# Altium PCB PCB1.PcbDoc
Units mil, origin at the board's own origin, x right, y up, seen from the top; angles counter-clockwise.
Board outline 10000 x 8000 mil, 2 copper layers (Top Layer, Bottom Layer); 40 components, 29 nets, 128 pads, 0 vias.
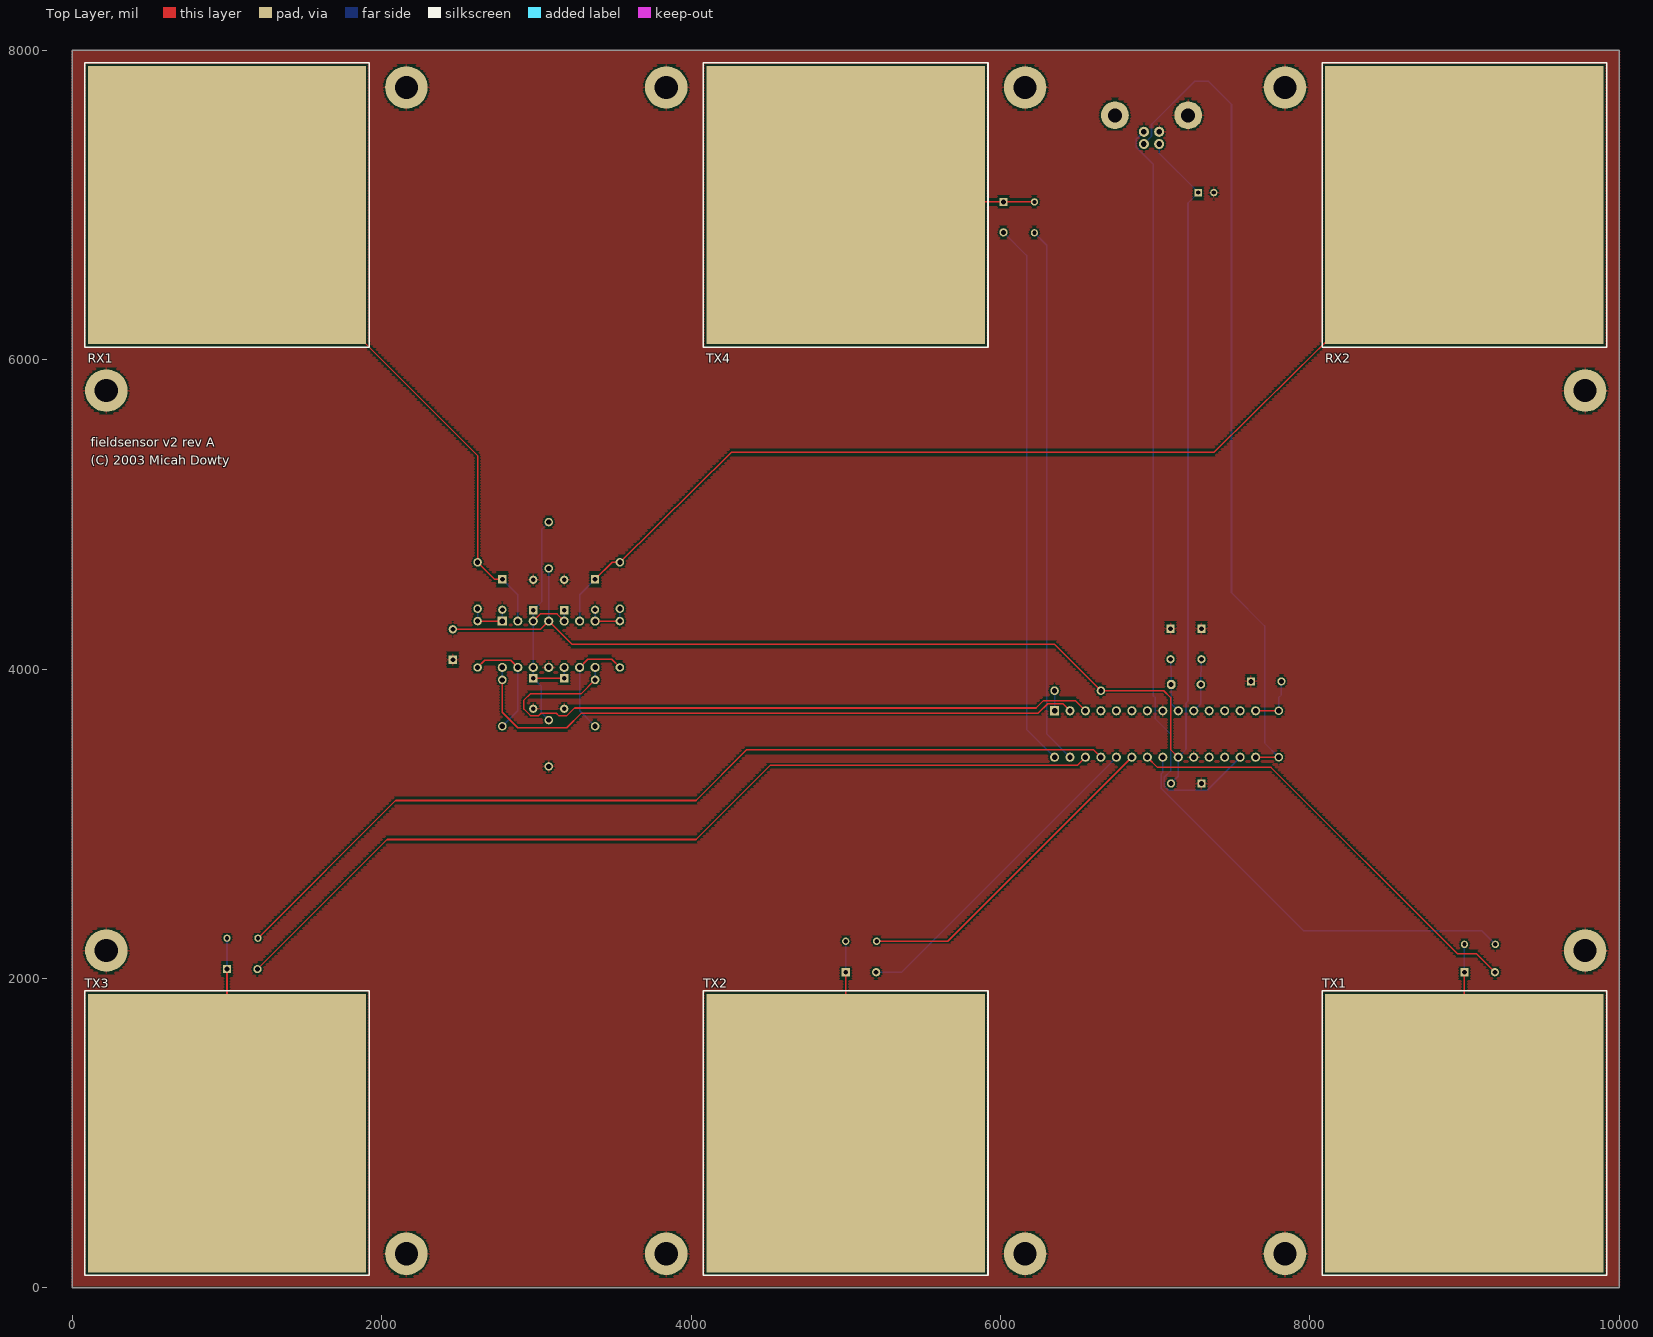
[diagram p0: Top Layer view]
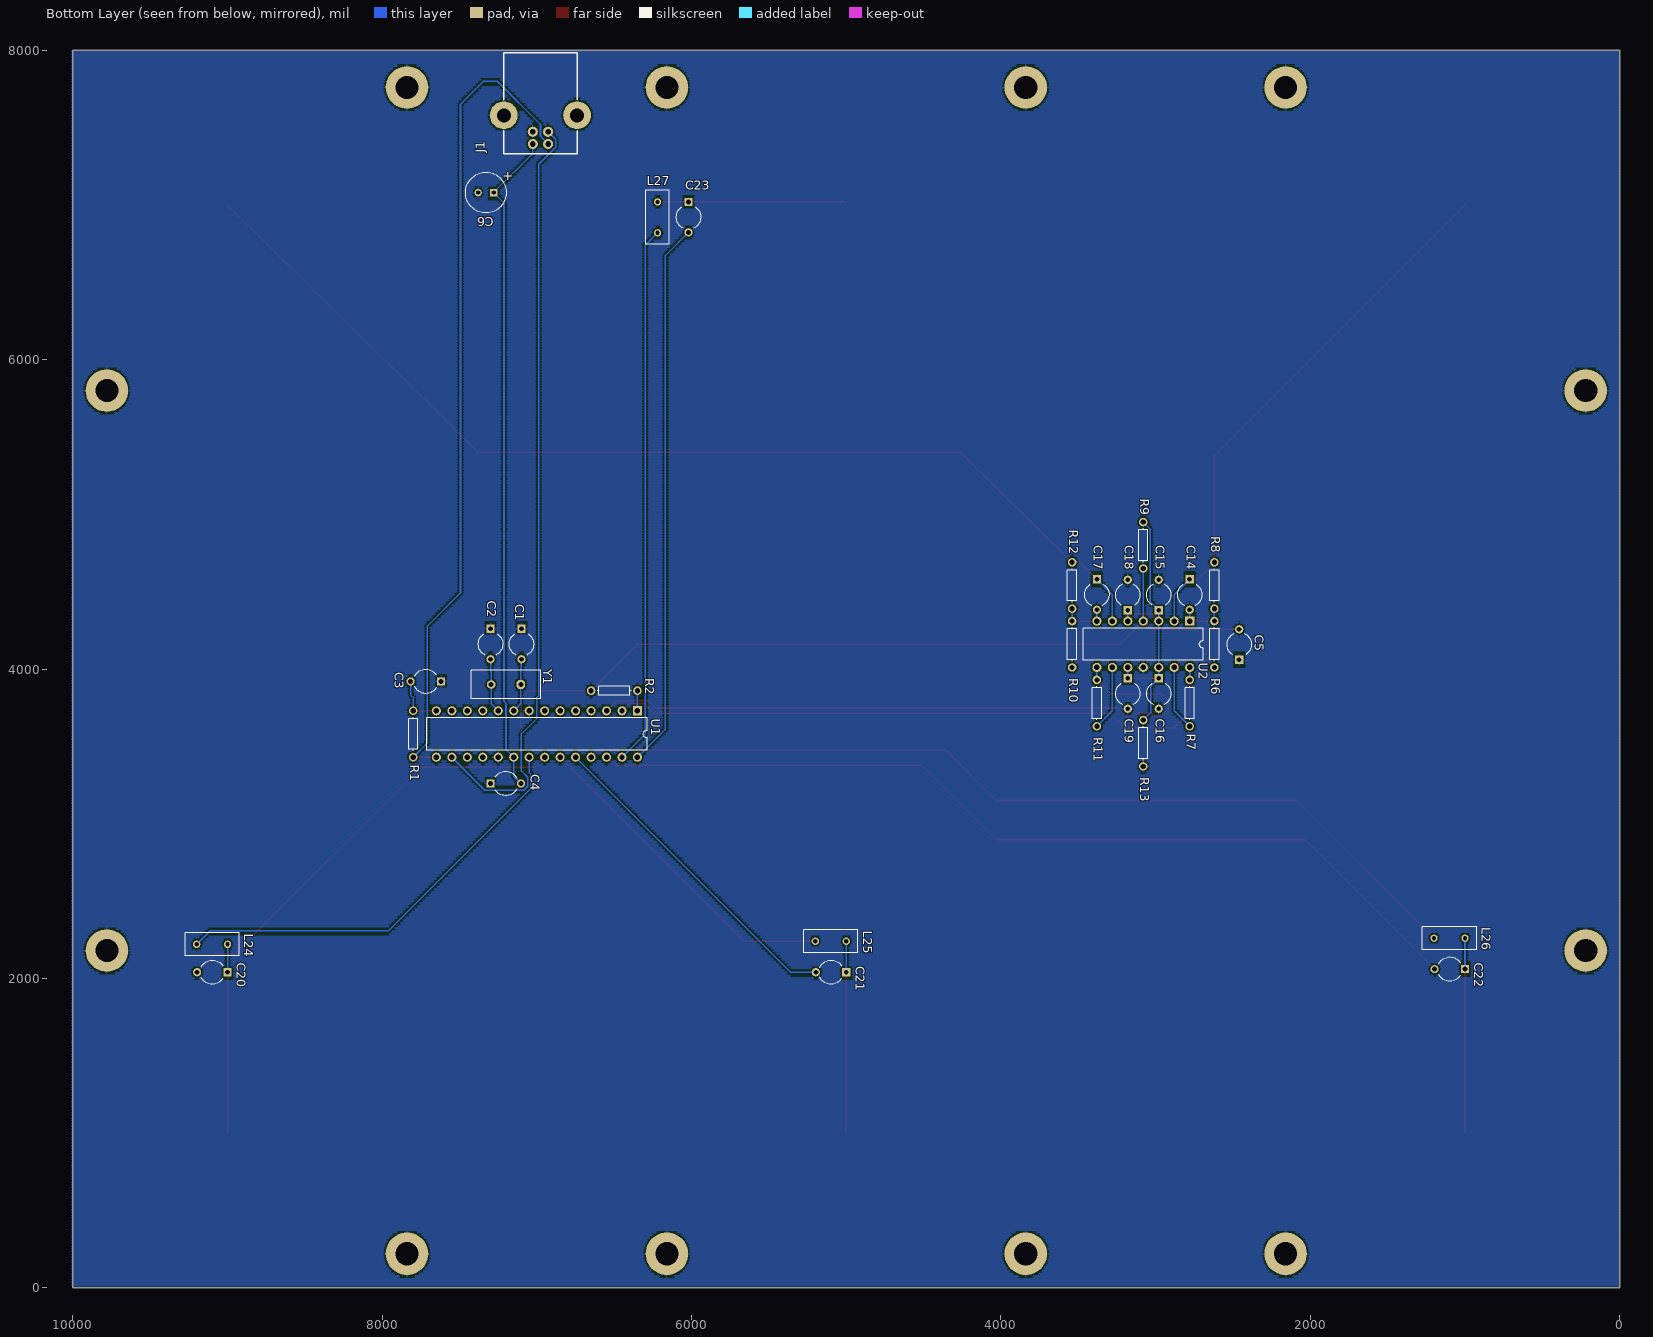
[diagram p1: Bottom Layer view, seen from below]

## Layer stack, top to bottom
Top Layer: signal copper 1.4
Dielectric: dielectric 12.6, FR-4, Dk 4.8
Bottom Layer: signal copper 1.4

## Board outline
0,0 10000,0 10000,8000 0,8000

## Design rules (kind name [scope] priority, off if disabled: settings)
Clearance [All] p1: gap=10
ComponentClearance [All] p1: gap=10 collisioncheckmode=0
HoleSize [All] p1: absolutevalues=TRUE maxlimit=200 minlimit=1 maxpercent=80.000 minpercent=20.000
PolygonConnect [All] p1: connectstyle=Relief reliefconductorwidth=10 reliefentries=4 polygonreliefangle="90 Angle"
RoomDefinition Sheet1 [InComponentClass('Sheet1')] p1: confinementstyle=ConfineIn formatcopy=TRUE outline 0,8000 10000,8000 10000,0 0,0
RoutingCorners [All] p1: cornerstyle=Round minsetback=100 maxsetback=100
RoutingLayers [All] p1: top layer=Horizontal bottom layer=Vertical
RoutingVias [All] p1: holewidth=15 width=25 viastyle="Through Hole" minholewidth=15 minwidth=25 maxholewidth=15 maxwidth=25
SolderMaskExpansion [All] p1: expansion=4
TestPointUsage [All] p1: valid=0 allowmultiple=FALSE
Testpoint [All] p1: side=15 testpointundercomponent=TRUE minsize=40 maxsize=100 preferedsize=60 minholesize=0 maxholesize=40 preferedholesize=32 testpointgrid=1 style=1023 order=1234567890
Width [All] p1: maxlimit=30 minlimit=10 preferedwidth=10 minimp=50.000000 maximp=50.000000 favimp=50.000000
14 further rules are at their usual default settings.

## Components (designator, comment, footprint, x,y, rotation, side; value= is the part's Value field where it differs from the comment)
C1 "Cap2" CAPR5-4X5 7100,4260 r270 bottom
C2 "Cap2" CAPR5-4X5 7300,4260 r270 bottom
C3 "" CAPR5-4X5 7620,3920 r0 bottom
C4 "" CAPR5-4X5 7300,3260 r180 bottom
C5 "" CAPR5-4X5 2460,4060 r90 bottom
C6 "Cap Pol1" CAP-EE-1 7180,7080 r180 bottom
C14 "Cap2" CAPR5-4X5 2780,4580 r270 bottom
C15 "Cap2" CAPR5-4X5 2980,4380 r90 bottom
C16 "Cap2" CAPR5-4X5 2980,3940 r270 bottom (schematic designator C15)
C17 "Cap2" CAPR5-4X5 3380,4580 r270 bottom
C18 "Cap2" CAPR5-4X5 3180,4380 r90 bottom
C19 "Cap2" CAPR5-4X5 3180,3940 r270 bottom
C20 "Cap2" CAPR5-4X5 9000,2040 r0 bottom
C21 "Cap2" CAPR5-4X5 5000,2040 r0 bottom
C22 "Cap2" CAPR5-4X5 1000,2060 r0 bottom
C23 "Cap2" CAPR5-4X5 6020,7020 r270 bottom
J1 "USB Type B" USB-TYPEB 6740,7580 r0 bottom
L24 "" RAD-0.2 9200,2220 r180 bottom (schematic designator L1)
L25 "" RAD-0.2 5200,2240 r180 bottom
L26 "" RAD-0.2 1200,2260 r180 bottom
L27 "" RAD-0.2 6220,6820 r90 bottom
R1 "Res1" AXIAL-0.3 7800,3580 r270 bottom
R2 "Res1" AXIAL-0.3 6500,3860 r0 bottom
R6 "Res1" AXIAL-0.3 2620,4160 r270 bottom
R7 "Res1" AXIAL-0.3 2780,3780 r90 bottom
R8 "Res1" AXIAL-0.3 2620,4540 r270 bottom
R9 "Res1" AXIAL-0.3 3080,4800 r270 bottom
R10 "Res1" AXIAL-0.3 3540,4160 r270 bottom
R11 "Res1" AXIAL-0.3 3380,3780 r90 bottom
R12 "Res1" AXIAL-0.3 3540,4540 r270 bottom
R13 "Res1" AXIAL-0.3 3080,3520 r90 bottom (schematic designator R9)
RX1 "Antenna" FIELD_ANTENNA 1000,7000 r90 top
RX2 "Antenna" FIELD_ANTENNA 9000,7000 r90 top
TX1 "Antenna" FIELD_ANTENNA 9000,1000 r90 top
TX2 "Antenna" FIELD_ANTENNA 5000,1000 r90 top
TX3 "Antenna" FIELD_ANTENNA 1000,1000 r90 top
TX4 "Antenna" FIELD_ANTENNA 5000,7000 r90 top
U1 "PIC16C745" DIP-28 7000,3580 r0 bottom (schematic designator U?)
U2 "MAX475CPD" DIP-14/D19.7 3080,4160 r0 bottom
Y1 "6 MHz" BCY-W2/E4.7 7200,3900 r0 bottom

## Footprints (in the part's own frame and the unit in brackets; to place one, negate y for a bottom-side part, rotate by r counter-clockwise, add the part's x,y. Pads: shape width x height; smd on the part's side, far side on the other; paste and mask are expansions set on the pad)
AXIAL-0.3 [mm]
  round 1.4 hole 0.85: 1(-3.81,0) 2(3.81,0)
  silkscreen extent -2.77,-0.76 2.77,0.76
BCY-W2/E4.7 [mm]
  oct 1.4x1.4 hole 0.8: 1(-2.44,0)
  round 1.4 hole 0.8: 2(2.44,0)
  silkscreen extent -5.7,-2.35 5.7,2.35
CAP-EE-1 [mm]
  rect 1.2x1.2 hole 0.7: 1(-2.54,0)
  round 1.2 hole 0.7: 2(-5.08,0)
  silkscreen extent -7.15,-3.34 -0.47,3.34
CAPR5-4X5 [mm]
  rect 1.35x1.35 hole 0.8: 1(0,0)
  round 1.35 hole 0.8: 2(5,0)
  silkscreen extent 0.81,-2 4.32,2
DIP-14/D19.7 [mm]
  rect 1.5x1.5 hole 0.9: 1(-7.62,-3.81)
  round 1.5 hole 0.9: 2(-5.08,-3.81) 3(-2.54,-3.81) 4(0,-3.81) 5(2.54,-3.81) 6(5.08,-3.81) 7(7.62,-3.81) 8(7.62,3.81) 9(5.08,3.81) 10(2.54,3.81) 11(0,3.81) 12(-2.54,3.81) 13(-5.08,3.81) 14(-7.62,3.81)
  silkscreen extent -9.85,-2.65 9.85,2.65
DIP-28 [mm]
  rect 1.5x1.5 hole 0.9: 1(-16.51,-3.81)
  round 1.5 hole 0.9: 2(-13.97,-3.81) 3(-11.43,-3.81) 4(-8.89,-3.81) 5(-6.35,-3.81) 6(-3.81,-3.81) 7(-1.27,-3.81) 8(1.27,-3.81) 9(3.81,-3.81) 10(6.35,-3.81) 11(8.89,-3.81) 12(11.43,-3.81) 13(13.97,-3.81) 14(16.51,-3.81) 15(16.51,3.81) 16(13.97,3.81) 17(11.43,3.81) 18(8.89,3.81) 19(6.35,3.81) 20(3.81,3.81) 21(1.27,3.81) 22(-1.27,3.81) 23(-3.81,3.81) 24(-6.35,3.81) 25(-8.89,3.81) 26(-11.43,3.81) 27(-13.97,3.81) 28(-16.51,3.81)
  silkscreen extent -18.1,-2.65 18.1,2.65
FIELD_ANTENNA [mil]
  rect 1800x1800 smd: 1(0,0)
  silkscreen extent -920,-920 920,920
RAD-0.2 [mm]
  round 1.2 hole 0.7: 1(0,0) 2(5.08,0)
  silkscreen extent -1.91,-1.91 6.98,1.91
USB-TYPEB [mil]
  round 65 hole 36.22: 1(286.22,185.43) 2(187.8,185.43) 3(187.8,106.69) 4(286.22,106.69)
  round 180 hole 90.55: 5(0,0) 5(474.02,0)
  silkscreen extent 0,-406 474,248

## Part data
C1 C2 C14 C15 C16 C17 C18 C19 C20 C21 C22 C23: "Capacitor"
C3 C4 C5: library part Cap2, "Capacitor"
C6: "Polarized Capacitor (Radial)"
J1: "Header, 4-Pin"
L24 L25 L26 L27: library part Inductor, "Inductor"
R1 R2 R6 R7 R8 R9 R10 R11 R12 R13: "Resistor"
RX1 RX2 TX1 TX2 TX3 TX4: library part Socket, "Socket"
U1: "EPROM-Based 8-Bit CMOS Microcontroller with USB"
U2: "Quad 10MHz, Single Supply Operational Amplifier"
Y1: library part XTAL, "Crystal Oscillator"

## Free pads (board coordinates)
  round 275 hole 150: 1(220,2180) 1(220,5800) 1(2160,220) 1(2160,7760) 1(3840,220) 1(3840,7760) 1(6160,220) 1(6160,7760) 1(7840,220) 1(7840,7760) 1(9780,2180) 1(9780,5800)

## Nets (pads, with @x,y where several pads share a name; then routed paths per layer and width w, separated by ;. In a path a pad name is that pad's centre, name@x,y a point inside that pad or via, vN(x,y) a via of type N, cw(c..) or ccw(c..) an arc to the next point about the centre after c; other vN are vias at no path point)
GND: C1.1 C2.1 C3.1 C4.1 C5.1 C6.2 C15.2 C16.2 C18.2 C19.2 J1.4 J1.5@7214.02,7580 pad.1 R13.1 U1.8 U1.19 U2.11
NetC1_2: C1.2 U1.9 Y1.1 | length 353.9
  Bottom Layer w10: C1.2 7100,4005.94 7103.94,4002 Y1.1 7103.94,3776.06 U1.9
NetC2_2: C2.2 U1.10 Y1.2 | length 353.9
  Bottom Layer w10: U1.10 7296.06,3776.06 Y1.2 7296.06,3979 7300,3982.94 C2.2
NetC3_2: C3.2 R1.1 U1.14 | length 347
  Top Layer w10: U1.14 R1.1
  Bottom Layer w10: R1.1 7800,3816 7816.85,3832.85 C3.2
NetC14_1: C14.1 R8.1 RX1.1 U2.2 | length 3498
  Top Layer w10: RX1.1 2620,5380 R8.1 2730,4580 C14.1
  Bottom Layer w10: C14.1 2880,4480 U2.2
NetC14_2: C14.2 R6.1 R8.2 U2.1 | length 313.1
  Top Layer w10: R6.1 U2.1
  Bottom Layer w10: R6.1 R8.2 ; U2.1 C14.2
NetC15_1: C15.1 C16.1 C18.1 C19.1 R9.1 R13.2 U2.3 U2.5 U2.10 U2.12 | length 1941
  Top Layer w10: C16.1 C19.1 ; U2.3 3026,4356 3134,4356 U2.5
  Bottom Layer w10: R13.2 3031,3719 3031,3889 C16.1 U2.12 U2.3 C15.1 3036,4436 3036,4906 R9.1 ; C19.1 U2.10 ; U2.5 C18.1
NetC17_1: C17.1 R12.1 RX2.1 U2.6 | length 6925.1
  Top Layer w10: C17.1 3490,4690 R12.1 4260,5400 6820,5400 7380,5400 RX2.1
  Bottom Layer w10: U2.6 3280,4480 C17.1
NetC17_2: C17.2 R10.1 R12.2 U2.7 | length 313.1
  Top Layer w10: U2.7 R10.1
  Bottom Layer w10: U2.7 C17.2 ; R10.1 R12.2
NetC20_1: C20.1 L24.2 TX1.1 | length 1220
  Top Layer w10: TX1.1 C20.1
  Bottom Layer w10: C20.1 L24.2
NetC20_2: C20.2 U1.22 | length 2822.6
  Top Layer w10: U1.22 7016,3364 7750,3364 8955,2159 9077.85,2159 C20.2
NetC21_1: C21.1 L25.2 TX2.1 | length 1240
  Top Layer w10: TX2.1 C21.1
  Bottom Layer w10: C21.1 L25.2
NetC21_2: C21.2 U1.24 | length 2128.9
  Bottom Layer w10: C21.2 5360,2040 U1.24
NetC22_1: C22.1 L26.2 TX3.1 | length 1260
  Top Layer w10: TX3.1 C22.1
  Bottom Layer w10: C22.1 L26.2
NetC22_2: C22.2 U1.26 | length 5920.6
  Top Layer w10: C22.2 2034.85,2898 4032,2898 4511,3377 6497,3377 U1.26
NetC23_1: C23.1 L27.2 TX4.1 | length 1228.3
  Top Layer w10: TX4.1 5020,7020 C23.1 L27.2
NetC23_2: C23.2 U1.28 | length 3529.8
  Bottom Layer w10: C23.2 6169,6674.15 6169,3611 U1.28
NetJ1_2: J1.2 R1.2 U1.15 | length 5339.4
  Top Layer w10: U1.15 R1.2
  Bottom Layer w10: J1.2 6977,7443.77 6977,7521 7256,7800 7346,7800 7494,7652 7494,4493 7708,4279 7708,3522 R1.2
NetJ1_3: J1.3 U1.16 | length 4948.5
  Bottom Layer w10: J1.3 6879,7424.51 6879,7374 6989,7264 6989,3827 7000,3816 7000,3680 7100,3580 7100,3340.43 7060,3300.43 7060,3241.57 7084.57,3217 7337,3217 U1.16
NetL24_1: L24.1 U1.21 | length 2783.7
  Bottom Layer w10: U1.21 7050,3331 7040,3321 7040,3228 7960,2308 9112,2308 L24.1
NetL25_1: L25.1 U1.23 | length 2142.9
  Top Layer w10: L25.1 5660,2240 U1.23
NetL26_1: L26.1 U1.25 | length 5975.2
  Top Layer w10: L26.1 2090,3150 4032,3150 4361,3479 6601,3479 U1.25
NetL27_1: L27.1 U1.27 | length 3485.3
  Bottom Layer w10: L27.1 6300,6740 6300,3580 U1.27
NetR2_1: R2.1 U1.1 | length 130
  Bottom Layer w10: U1.1 R2.1
NetR6_2: R6.2 R7.1 U2.13 | length 719.5
  Top Layer w10: R6.2 2666,4056 2834,4056 U2.13
  Bottom Layer w10: R7.1 2880,3730 U2.13
NetR7_2: R7.2 U1.2 U2.14 | length 4084.3
  Top Layer w10: R7.2 2780,3720 2880,3620 3197,3620 3292,3715 6245.47,3715 6305.47,3775 6405,3775 U1.2
  Bottom Layer w10: R7.2 U2.14
NetR10_2: R10.2 R11.1 U2.9 | length 725.3
  Top Layer w10: U2.9 3333,4063 3487,4063 R10.2
  Bottom Layer w10: U2.9 3280,3730 R11.1
NetR11_2: R11.2 U1.3 U2.8 | length 4379.6
  Top Layer w10: R11.2 3289,3839 2960,3839 2920,3799 2920,3741 2962,3699 3016,3699 3031,3714 3129,3714 3144,3699 3198,3699 3247,3748 6231,3748 6279,3796 6484,3796 U1.3
  Bottom Layer w10: R11.2 U2.8
VCC: C4.2 C5.2 C6.1 J1.1 R2.2 R9.2 U1.20 U2.4 | length 9926.3
  Top Layer w10: C5.2 3026.85,4256.85 U2.4 3230,4160 6350,4160 R2.2 7056,3860 7100,3816 7100,3480 U1.20
  Bottom Layer w10: U2.4 R9.2 ; J1.1 7026.22,7333.78 C6.1 7213,7013 7213,3791 7200,3778 7200,3480 U1.20 7150,3306.85 C4.2
pads on no net: J1.5@6740,7580 U1.4 U1.5 U1.6 U1.7 U1.11 U1.12 U1.13 U1.17 U1.18

## Polygon pours and split planes (outlines as drawn)
GND on Top Layer (hatched Horizontal grid 18 track 20, remove dead copper): 0,8000 10000,8000 10000,0 0,0
GND on Bottom Layer (hatched Horizontal grid 18 track 20, remove dead copper): 3.77,8000 10003.77,8000 10003.77,0 3.77,0

## Silkscreen, mask and mechanical layers (free items; w line width, h text height)
Top Overlay:
  text "fieldsensor v2 rev A" at 120,5436 h60
  text "(C) 2003 Micah Dowty" at 120,5320 h60
Mechanical 1:
  the board outline again, w10

## Text inside footprints (layer, text, board x,y; h text height)
C6: Bottom Overlay "+" at 7220,7160 h59.06